# Altium PCB uChord Logic.PcbDoc (part 2 of 2)
Units mm, origin at the board's own origin, x right, y up, seen from the top; angles counter-clockwise.
Board outline 285 x 95.88 mm, 2 copper layers (Top Layer, Bottom Layer), stack 1.577 mm thick; 120 components, 85 nets, 515 pads, 29 vias.
Unrouted connection lines stored in the file: 54.
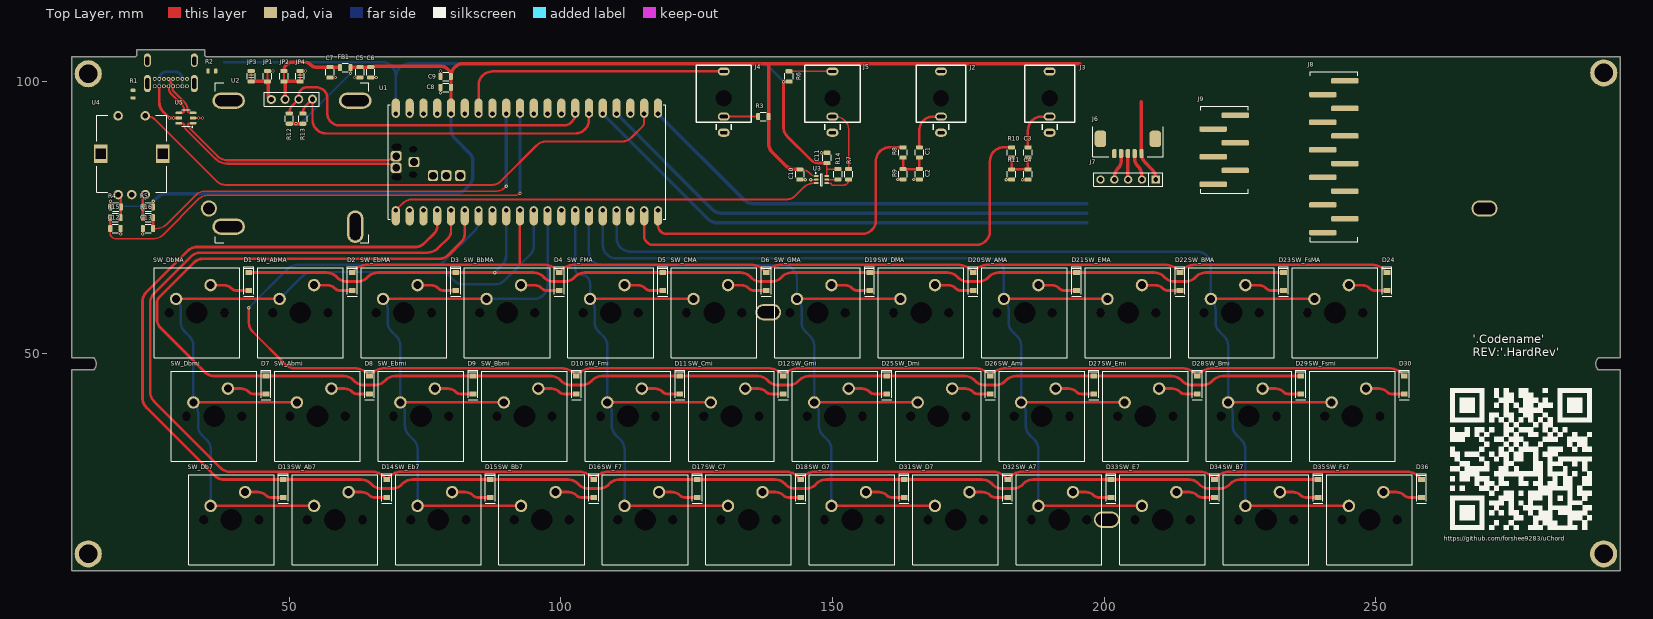
[diagram p0: Top Layer view]

## Via types
v1: diameter 0.61, hole 0.305, Top Layer to Bottom Layer, tented both sides, 29 vias

## Nets (pads, with @x,y where several pads share a name; then routed paths per layer and width w, separated by ;. In a path a pad name is that pad's centre, name@x,y a point inside that pad or via, vN(x,y) a via of type N, cw(c..) or ccw(c..) an arc to the next point about the centre after c; other vN are vias at no path point) (continued)
ROW_MIN_1: (continued)
  Top Layer w0.457: v1(42.545,58.42) 42.545,55.789 ccw(c45.085,55.789) 43.289,53.993 49.294,47.988 ccw(c51.09,49.784) 51.09,47.244 62.31,47.244 cw(c62.31,44.704) 64.106,46.5 D8.1 65.434,46.5 cw(c67.23,44.704) 67.23,47.244 100.41,47.244 cw(c100.41,44.704) 102.206,46.5 D10.1 103.534,46.5 cw(c105.33,44.704) 105.33,47.244 138.51,47.244 cw(c138.51,44.704) 140.306,46.5 D12.1 141.634,46.5 cw(c143.43,44.704) 143.43,47.244 176.61,47.244 cw(c176.61,44.704) 178.406,46.5 D26.1 179.734,46.5 cw(c181.53,44.704) 181.53,47.244 214.71,47.244 cw(c214.71,44.704) 216.506,46.5 D28.1 217.834,46.5 cw(c219.63,44.704) 219.63,47.244 252.81,47.244 cw(c252.81,44.704) 254.606,46.5 D30.1
  Bottom Layer w0.457: v1(42.545,58.42) 49.675,65.55 cw(c51.471,63.754) 51.471,66.294 77.133,66.294 ccw(c77.133,68.028) 78.359,66.802 84.116,72.559 ccw(c82.32,74.355) 84.86,74.355 U1.7@84.86,76.36
STRUM_INT: J6.4 J7.4 U1.21 | length 90.9
  Top Layer w0.635: J7.4 201.904,82.361 cw(c204.444,82.361) 202.648,84.157 202.692,84.201 ccw(c201.601,85.292) 203.144,85.292 J6.4
  Bottom Layer w0.635: U1.21@117.88,94.14 133.679,78.341 ccw(c135.475,80.137) 135.475,77.597 196.85,77.597
USB_D_CON_N: J1.A7 J1.B7 U5.3 | length 8.4
  Top Layer w0.381: J1.B7 J1.A7 ccw(c28.767,99.053) 28.559,99.053 28.559,98.943 cw(c28.488,98.943) 28.538,98.893 ccw(c28.588,98.843) 28.517,98.843 28.517,98.665 ccw(c29.016,98.665) 28.663,98.313 30.62,96.357 cw(c28.964,94.701) 31.305,94.701 ccw(c31.686,94.701) 31.417,94.432 ccw(c31.686,94.701) 31.686,94.32 32.227,94.32 cw(c32.227,94.234) U5.3
USB_D_CON_P: J1.A6 J1.B6 U5.4 | length 8.4
  Top Layer w0.381: J1.A6 cw(c27.633,99.053) 27.841,99.053 27.841,98.943 ccw(c27.912,98.943) 27.862,98.893 cw(c27.812,98.843) 27.882,98.843 27.882,98.534 ccw(c28.698,98.534) 28.121,97.957 30.171,95.908 cw(c28.964,94.701) 30.67,94.701 cw(c30.29,94.701) 30.559,94.432 cw(c30.29,94.701) 30.29,94.32 29.749,94.32 ccw(c29.749,94.234) U5.4
  Bottom Layer w0.381: J1.A6 J1.B6
USB_D_N: U1.TP2 U5.1 | length 42.4
  Top Layer w0.381: U5.1 cw(c32.227,92.456) 32.227,92.37 31.686,92.37 ccw(c31.686,91.989) 31.417,92.258 ccw(c31.686,91.989) 31.305,91.989 ccw(c31.686,91.989) 31.417,91.719 36.825,86.311 ccw(c38.621,88.107) 38.621,85.567 45.466,85.567 67.83,85.567 ccw(c67.83,87.642) 69.298,86.175 cw(c69.67,85.803) U1.TP2
USB_D_P: U1.TP3 U5.6 | length 43.4
  Top Layer w0.381: U5.6 ccw(c29.749,92.456) 29.749,92.37 30.29,92.37 cw(c30.29,91.989) 30.559,92.258 cw(c30.29,91.989) 30.67,91.989 ccw(c31.686,91.989) 30.968,91.27 36.376,85.862 ccw(c38.621,88.107) 38.621,84.932 45.466,84.932 67.83,84.932 cw(c67.83,82.858) 69.298,84.325 ccw(c69.67,84.697) U1.TP3
USB_VBUS: C11.2 J1.A4 J1.A9 J1.B4 J1.B9 R6.2 R14.2 U1.40 U3.6 U5.5 | length 155.7
  Top Layer w0.254: v1(141,100.045) R6.2 ; U3.6 148.95,83.955 ; C11.2 ccw(c149.121,84.924) 148.95,84.924 148.95,83.955 ; R14.2 148.95,83.955
  Top Layer w0.508: J1.A4 26.08,96.257 ccw(c28.62,96.257) 26.824,94.461 v1(27.94,93.345) v1(28.687,93.345) U5.5 ; v1(141,100.045) 141,91.7 ccw(c143.54,91.7) 141.744,89.904 145.859,85.789 ccw(c147.655,87.585) 147.655,85.045 C11.2
  Bottom Layer w0.508: J1.A4 J1.B9 cw(c27.384,100.55) 27.384,101.854 29.016,101.854 cw(c29.016,100.55) J1.B4 J1.A9 ; 38.1,103.632 67.08,103.632 cw(c67.08,101.092) 69.62,101.092 69.62,100.838 ; U1.40@69.62,94.14 69.62,100.838 ; v1(141,100.045) 138.411,102.634 ccw(c136.615,100.838) 136.615,103.378 72.16,103.378 ccw(c72.16,100.838) 69.62,100.838
pads on no net: J1.A8 J1.B8 J2.0 J2.3 J3.0 J3.3 J4.0 J5.0 J6.0 J8.1 J8.2 J8.3 J8.4 J8.5 J8.6 J8.7 J8.8 J8.9 J8.10 J8.11 J8.12 J9.1 J9.2 J9.3 J9.4 J9.5 J9.6 SW_A7.0 SW_Ab7.0 SW_AbMA.0 SW_Abmi.0 SW_AMA.0 SW_Ami.0 SW_B7.0 SW_Bb7.0 SW_BbMA.0 SW_Bbmi.0 SW_BMA.0 SW_Bmi.0 SW_C7.0 SW_CMA.0 SW_Cmi.0 SW_D7.0 SW_Db7.0 SW_DbMA.0 SW_Dbmi.0 SW_DMA.0 SW_Dmi.0 SW_E7.0 SW_Eb7.0 SW_EbMA.0 SW_Ebmi.0 SW_EMA.0 SW_Emi.0 SW_F7.0 SW_FMA.0 SW_Fmi.0 SW_Fs7.0 SW_FsMA.0 SW_Fsmi.0 SW_G7.0 SW_GMA.0 SW_Gmi.0 U1.0 U1.29 U1.30 U1.37 U1.39 U1.TP4 U1.TP5 U1.TP6 U4.3 U4.4

## Silkscreen, mask and mechanical layers (free items; w line width, h text height)
Top Overlay:
  drawing of 70 lines, arcs and shapes, not listed
  text "'.Codename'  / REV:'.HardRev'" at 267.843,49.53 h1.57
  text "https://github.com/forshee9283/uChord" at 262.509,15.494 h0.79
Bottom Overlay:
  rectangle: 37.465,58.928 43.434,64.897
Top Solder:
  text "é" at 15.829,13.187 h50.8
Mechanical 1:
  lines w0.2: 294.988,10 10,10 10,47 14,47 ccw(c12.9,48.1) 14,49.2 10,49.2 10,104.6 21.669,104.6 21.918,104.849 21.918,105.875 28.2,105.875 34.482,105.875 34.482,104.849 34.731,104.6 294.988,104.6 295,104.588 295,49.188 291,49.188 ccw(c292.1,48.088) 291,46.988 295,46.988 295,10
Mechanical 15:
  lines w0.2: 21.918,99.875 28.2,99.875